# Altium PCB klokun.PcbDoc
Units mil, origin at the board's own origin, x right, y up, seen from the top; angles counter-clockwise.
Board outline 5000 x 4000 mil, 2 copper layers (Top Layer, Bottom Layer); 28 components, 19 nets, 52 pads, 1 vias.
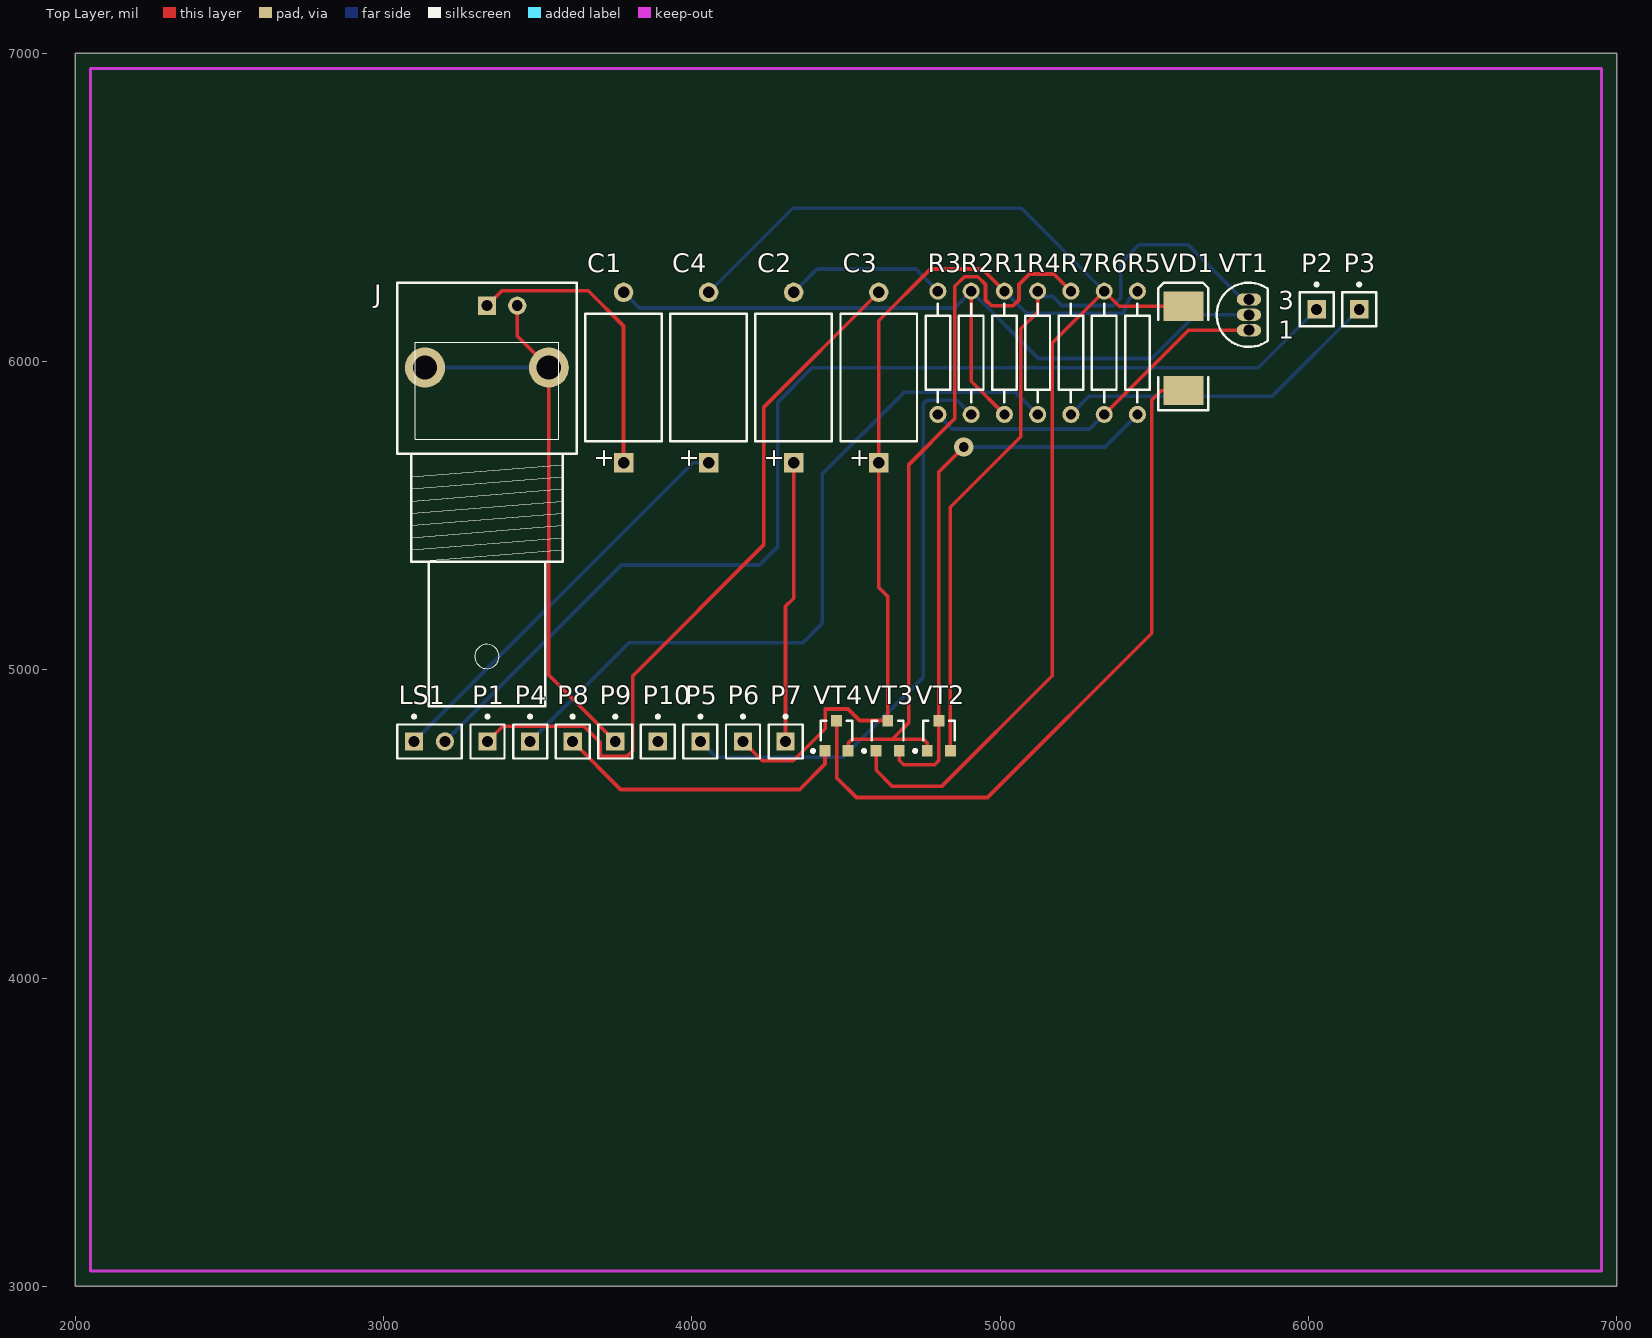
[diagram p0: Top Layer view]
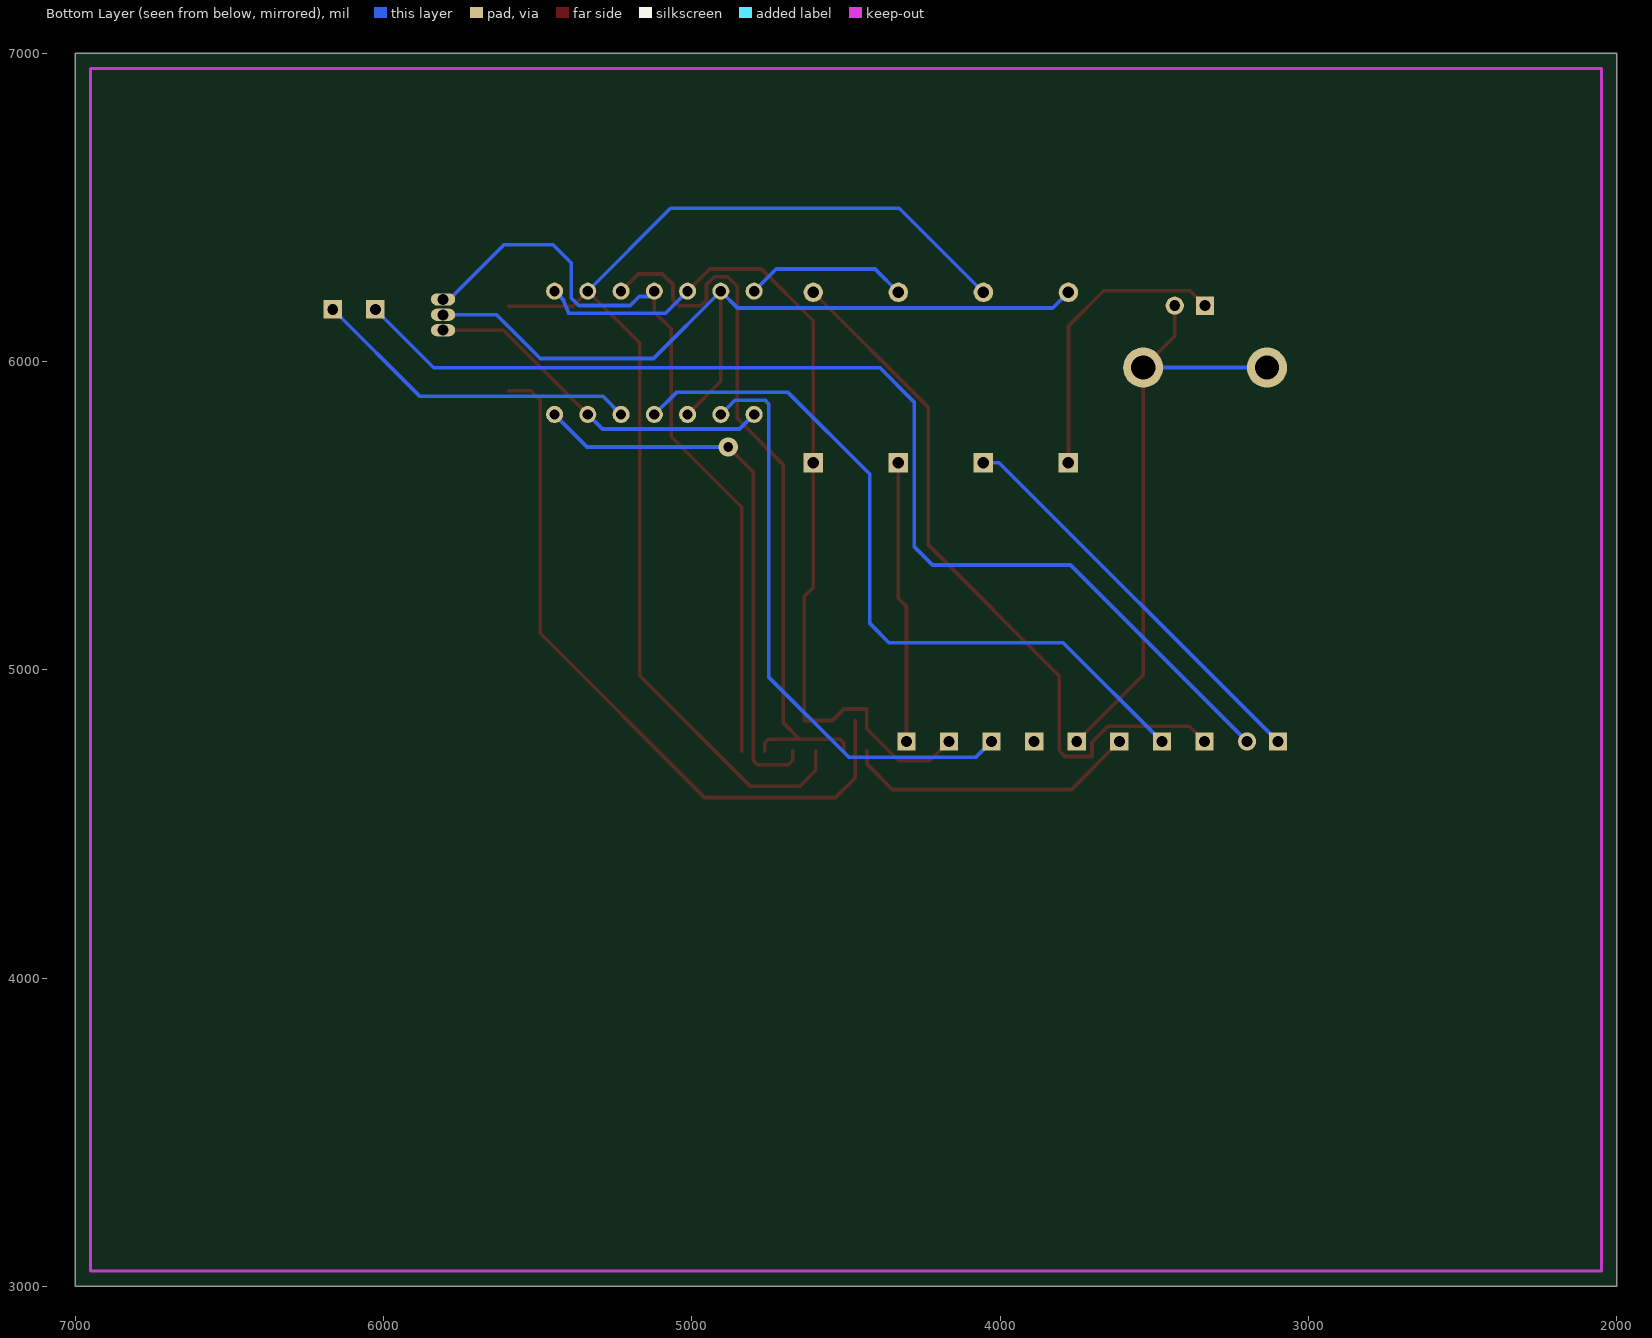
[diagram p1: Bottom Layer view, seen from below]

## Layer stack, top to bottom
Top Layer: signal copper 1.4
Dielectric: dielectric 12.6, FR-4, Dk 4.8
Bottom Layer: signal copper 1.4

## Board outline
2000,3000 7000,3000 7000,7000 2000,7000

## Design rules (kind name [scope] priority, off if disabled: settings)
Clearance [All] p1: gap=13
PolygonConnect [All] p1: connectstyle=Relief reliefconductorwidth=10 reliefentries=4 polygonreliefangle="90 Angle"
RoomDefinition klokun [InComponentClass('klokun')] p1: confinementstyle=ConfineIn formatcopy=TRUE lockcomponents=FALSE outline 7045,3140 13355,3140 13355,4535 7045,4535
RoutingVias [All] p1: holewidth=32 width=62 viastyle="Through Hole" minholewidth=28 minwidth=50 maxholewidth=28 maxwidth=50
SilkscreenOverComponentPads [All] p1: minsilkscreentomaskgap=10
SolderMaskExpansion [All] p1: expansion=4
TestPointUsage [All] p1: valid=0 allowmultiple=FALSE
Testpoint [All] p1: side=15 testpointundercomponent=TRUE minsize=40 maxsize=100 preferedsize=60 minholesize=0 maxholesize=40 preferedholesize=32 testpointgrid=1 style=1023 order=0123456789
Width [All] p1: maxlimit=12 minlimit=12 preferedwidth=12
23 further rules are at their usual default settings.

## Components (designator, comment, footprint, x,y, rotation, side; value= is the part's Value field where it differs from the comment)
C1 "Cap Pol2" CAPPA14.05-10.5x6.3 3778.5,5947.93 r90 top
C2 "Cap Pol2" CAPPA14.05-10.5x6.3 4330.31,5947.93 r90 top
C3 "Cap Pol2" CAPPA14.05-10.5x6.3 4606.22,5947.93 r90 top
C4 "Cap Pol2" CAPPA14.05-10.5x6.3 4054.41,5947.93 r90 top
J "BNC" "BNC_RA CON" 3335.28,6181.26 r90 top
LS1 "Speaker" PIN2 3099.06,4767.56 r0 top
P1 "Plug" PIN1 3337.17,4767.56 r0 top
P2 "Plug" PIN1 6026.68,6169.45 r0 top
P3 "Plug" PIN1 6164.79,6169.45 r0 top
P4 "Plug" PIN1 3475.28,4767.56 r0 top
P5 "Plug" PIN1 4027.72,4767.56 r0 top
P6 "Plug" PIN1 4165.83,4767.56 r0 top
P7 "Plug" PIN1 4303.94,4767.56 r0 top
P8 "Plug" PIN1 3613.39,4767.56 r0 top
P9 "Plug" PIN1 3751.5,4767.56 r0 top
P10 "-12 В" PIN1 3889.61,4767.56 r0 top
R1 "Res2" AXIAL-0.4 5013.86,6028.44 r90 top
R2 "Res2" AXIAL-0.4 4905.98,6028.44 r90 top
R3 "Res2" AXIAL-0.4 4798.11,6028.44 r90 top
R4 "Res2" AXIAL-0.4 5121.73,6028.44 r90 top
R5 "Res2" AXIAL-0.4 5445.35,6028.44 r90 top
R6 "Res2" AXIAL-0.4 5337.48,6028.44 r90 top
R7 "Res2" AXIAL-0.4 5229.61,6028.44 r90 top
VD1 "КД213А" SMC 5594.13,6042.48 r90 top
VT1 "КТ315Б" TO-226 5807.05,6151.73 r0 top
VT2 "КТ361Б" SOT-23B 4801.07,4786.2 r0 top
VT3 "КТ837Д" SOT-23B 4635.34,4786.2 r0 top
VT4 "КТ837Д" SOT-23B 4469.61,4786.2 r0 top

## Footprints (in the part's own frame and the unit in brackets; to place one, negate y for a bottom-side part, rotate by r counter-clockwise, add the part's x,y. Pads: shape width x height; smd on the part's side, far side on the other; paste and mask are expansions set on the pad)
AXIAL-0.4 [mm] "Resistor; 2 Leads"
  round 1.4 hole 0.85: 1(-5.08,0) 2(5.08,0)
  silkscreen extent -4.06,-1.02 4.06,1.02
"BNC_RA CON" [mm] "Connector; BNC Elbow"
  rect 1.5x1.5 hole 0.9: 1(0,0)
  round 3.3 hole 2: 2(-5.1,-5.1) 2(-5.1,5.1)
  round 1.5 hole 0.9: 2(0,-2.5)
  silkscreen extent -33,-7.4 1.9,7.4
CAPPA14.05-10.5x6.3 [mm] "Capacitor, Axial, Polarised; Body 10.5 x 6.3 mm (LxDia. max), Lead Dia. 0.6 mm (typ)"
  rect 1.6x1.6 hole 0.95: 1(-7.025,0)
  round 1.6 hole 0.95: 2(7.025,0)
  silkscreen extent -5.25,-3.15 5.25,3.15
PIN1 [mm] "Connector; Plug"
  rect 1.5x1.5 hole 0.9: 1(0,0)
  silkscreen extent -1.4,-1.4 1.4,2.17
PIN2 [mm] "Photosensitive Diode; 2 Leads"
  rect 1.5x1.5 hole 0.9: 1(0,0)
  round 1.5 hole 0.9: 2(2.54,0)
  silkscreen extent -1.4,-1.4 3.94,2.17
SMC [mm] "DO-214-AB/SMC; 2 C-Bend Leads; Body 7.9 x 5.9 mm, inc. leads (LxW)"
  rect 2.4x3.3 smd: 1(-3.475,0) 2(3.475,0)
  silkscreen extent -5.07,-2.05 5.43,2.05
SOT-23B [mm] "SOT-23; 3 Leads; Body 3.0 x 2.6 mm, inc. leads (LxW max)"
  rect 0.9x0.95 smd: 1(-0.95,-1.25) 2(0.95,-1.25) 3(0,1.25)
  silkscreen extent -2.07,-1.37 1.3,1.25
TO-226 [mm] "TO, Flat Index; 3 In-Line, Axial Leads; Body Dia. 4.8mm; Leads 0.55 x 0.51 mm (max)"
  oval 2x1 hole 0.9: 1(0,-1.27) 2(0,0) 3(0,1.27)
  silkscreen extent -2.65,-2.65 1.55,2.65

## Part data
C1 C2 C3 C4: "Polarized Capacitor (Axial)"
J: "BNC Elbow Connector"
LS1: "Loudspeaker"
P10: library part Plug, "Plug"
R1 R2 R3 R4 R5 R6 R7: "Resistor"
VD1: library part Diode, "Default Diode"
VT1: library part NPN, "NPN Bipolar Transistor"
VT2 VT3 VT4: library part PNP, "PNP Bipolar Transistor"

## Via types
v1: diameter 62, hole 32, Top Layer to Bottom Layer, 1 vias

## Nets (pads, with @x,y where several pads share a name; then routed paths per layer and width w, separated by ;. In a path a pad name is that pad's centre, name@x,y a point inside that pad or via, vN(x,y) a via of type N, cw(c..) or ccw(c..) an arc to the next point about the centre after c; other vN are vias at no path point)
NetC1_1: C1.1 J.1 | length 955
  Top Layer w12: J.1 3384.02,6230 3664,6230 3778.5,6115.5 C1.1
NetC1_2: C1.2 R1.1 R2.2 VT1.2 | length 2665.9
  Top Layer w12: R2.2 4905.98,5936.32 R1.1
  Bottom Layer w12: C1.2 3829.01,6174 4851.54,6174 R2.2 5124.43,6010 5492,6010 5633.73,6151.73 VT1.2
NetC2_1: C2.1 P7.1 | length 914.7
  Top Layer w12: P7.1 4303.94,5206 4330.31,5232.38 C2.1
NetC2_2: C2.2 R3.2 | length 528.7
  Bottom Layer w12: C2.2 4405.81,6300 4726.55,6300 R3.2
NetC3_1: C3.1 P6.1 R1.2 R5.2 VT3.3 | length 2936.3
  Top Layer w12: P6.1 4228.39,4705 4329,4705 4432.89,4808.89 4432.89,4873.11 4506.32,4873.11 4544.03,4835.41 VT3.3 4635.34,5238 4606.22,5267.12 C3.1 4606.22,6132.22 4774,6300 4942.3,6300 R1.2
  Bottom Layer w12: R1.2 5085.42,6156.88 5400,6156.88 5416.42,6199.51 R5.2
NetC3_2: C3.2 P1.1 | length 2384.2
  Top Layer w12: P1.1 3386.61,4817 3650,4817 3702,4765 3702,4719 3789.5,4719 3808,4737.5 3808,4980 4232.72,5404.72 4232.72,5851 C3.2
NetC4_1: C4.1 LS1.1 | length 1329.7
  Bottom Layer w12: LS1.1 4002.85,5671.35 C4.1
NetC4_2: C4.2 R6.2 VD1.2 VT3.1 | length 3905.7
  Top Layer w12: VT3.1 4597.94,4674.06 4650,4622 4810,4622 5169,4981 5169,6059.96 R6.2 5386.63,6179.29 VD1.2
  Bottom Layer w12: C4.2 4326.91,6497 5068.92,6497 R6.2
NetJ_2: J.2 P9.1 | length 1946.9
  Top Layer w12: J.2@3433.7,6181.26 3433.7,6082.84 3536.06,5980.47 3536.06,4982.99 P9.1
  Bottom Layer w12: J.2@3134.49,5980.47 J.2@3536.06,5980.47
NetLS1_2: LS1.2 P2.1 | length 3683
  Bottom Layer w12: LS1.2 3771.5,5340 4219,5340 4279,5400 4279,5869 4390,5980 5837.23,5980 P2.1
NetP3_1: P3.1 R7.1 | length 1076.4
  Bottom Layer w12: R7.1 5289.16,5888 5883.34,5888 P3.1
NetP4_1: P4.1 R4.1 | length 2429
  Bottom Layer w12: P4.1 3795.72,5088 4360.5,5088 4422.5,5150 4422.5,5634.5 4688,5900 5050.17,5900 R4.1
NetP5_1: P5.1 R2.1 | length 1917.2
  Bottom Layer w12: P5.1 4078.28,4717 4491,4717 4751,4977 4751,5863 4763,5875 4859.42,5875 R2.1
NetP8_1: P8.1 VT4.1 | length 960.1
  Top Layer w12: P8.1 3768.95,4612 4350,4612 4432.2,4694.2 VT4.1
NetR3_1: R3.1 R6.1 VT1.1 | length 1161.4
  Top Layer w12: R6.1 5610.77,6101.73 VT1.1
  Bottom Layer w12: R3.1 4845.55,5781 5290.04,5781 R6.1
NetR4_2: R4.2 VT1.3 VT2.2 | length 2545.5
  Top Layer w12: VT2.2 4838.47,5527.47 5067,5756 5067,6106.38 5121.73,6161.11 R4.2
  Bottom Layer w12: R4.2 5121.73,6211 5170.88,6211 5200,6181.88 5366.88,6181.88 5391,6206 5391,6320 5450,6379 5609.73,6379 5787,6201.73 VT1.3
NetR5_1: R5.1 VT2.3 VT3.2 | length 1828.3
  Top Layer w12: VT3.2 4672.74,4706.76 4687.5,4692 4787.5,4692 4801.07,4705.57 VT2.3 4801.07,5642.07 v1(4882,5723)
  Bottom Layer w12: v1(4882,5723) 5339.91,5723 R5.1
NetR7_2: R7.2 VT2.1 VT4.2 | length 2554.3
  Top Layer w12: VT4.2 4507.01,4762.5 4519.51,4775 ; VT2.1 4763.67,4762.5 4751.17,4775 4650,4775 ; R7.2 5174.05,6284 5095,6284 5061,6250 5061,6200 5042,6181 4971.54,6181 4952.54,6200 4952.54,6250 4927.54,6275 4884,6275 4853,6244 4853,5815 4704,5666 4704,4829 4650,4775 ; 4519.51,4775 4650,4775 ; 4519.51,4775 4650,4775
NetVD1_1: VD1.1 VT4.3 | length 2325.7
  Top Layer w12: VT4.3 4469.61,4650.39 4534,4586 4959,4586 5492,5119 5492,5875 5522.67,5905.67 VD1.1
pads on no net: P10.1

## Keep-outs
Keep-Out Layer:
  lines w10: 2050,3050 2050,6950 6950,6950 6950,3050 2050,3050

## Text inside footprints (layer, text, board x,y; h text height)
C1: Top Overlay "+" at 3742.09,5651.67 h59.06 r90
C2: Top Overlay "+" at 4293.9,5651.67 h59.06 r90
C3: Top Overlay "+" at 4569.8,5651.67 h59.06 r90
C4: Top Overlay "+" at 4017.99,5651.67 h59.06 r90
VT1: Top Overlay "1" at 5902.36,6073.82 h59.05; Top Overlay "3" at 5902.36,6170.12 h59.05